# Altium PCB MPPT charger.PcbDoc
Units mm, origin at the board's own origin, x right, y up, seen from the top; angles counter-clockwise.
Board outline 24.13 x 33.02 mm, 2 copper layers (Top Layer, Bottom Layer); 24 components, 15 nets, 69 pads, 82 vias.
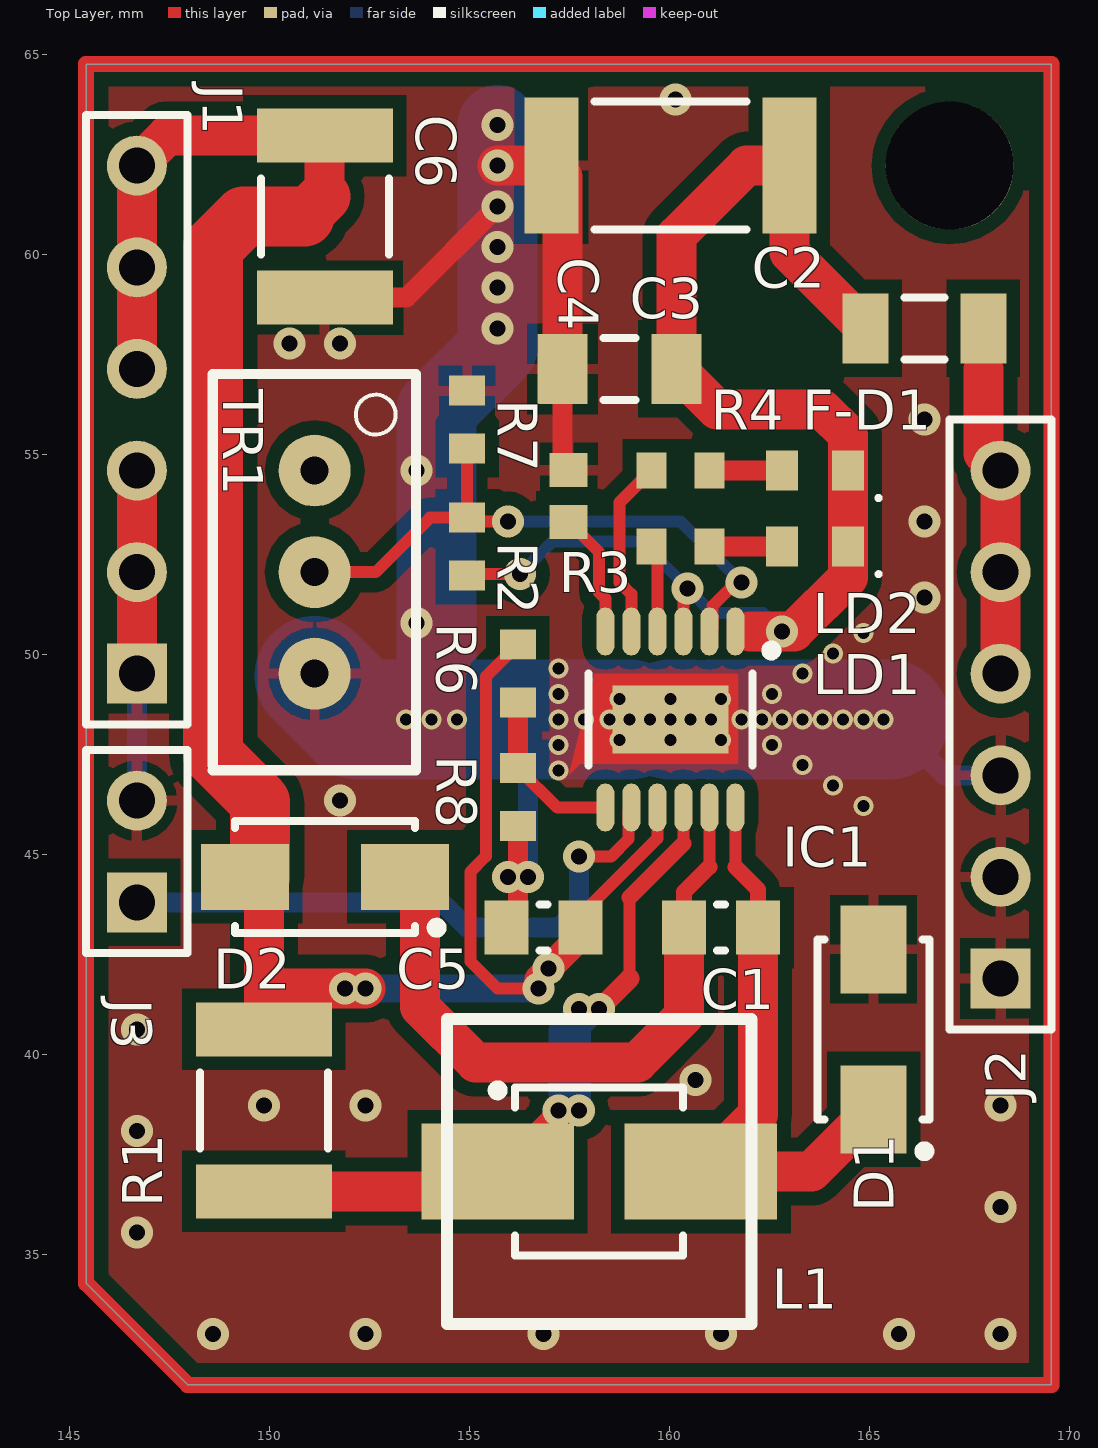
[diagram p0: Top Layer view]
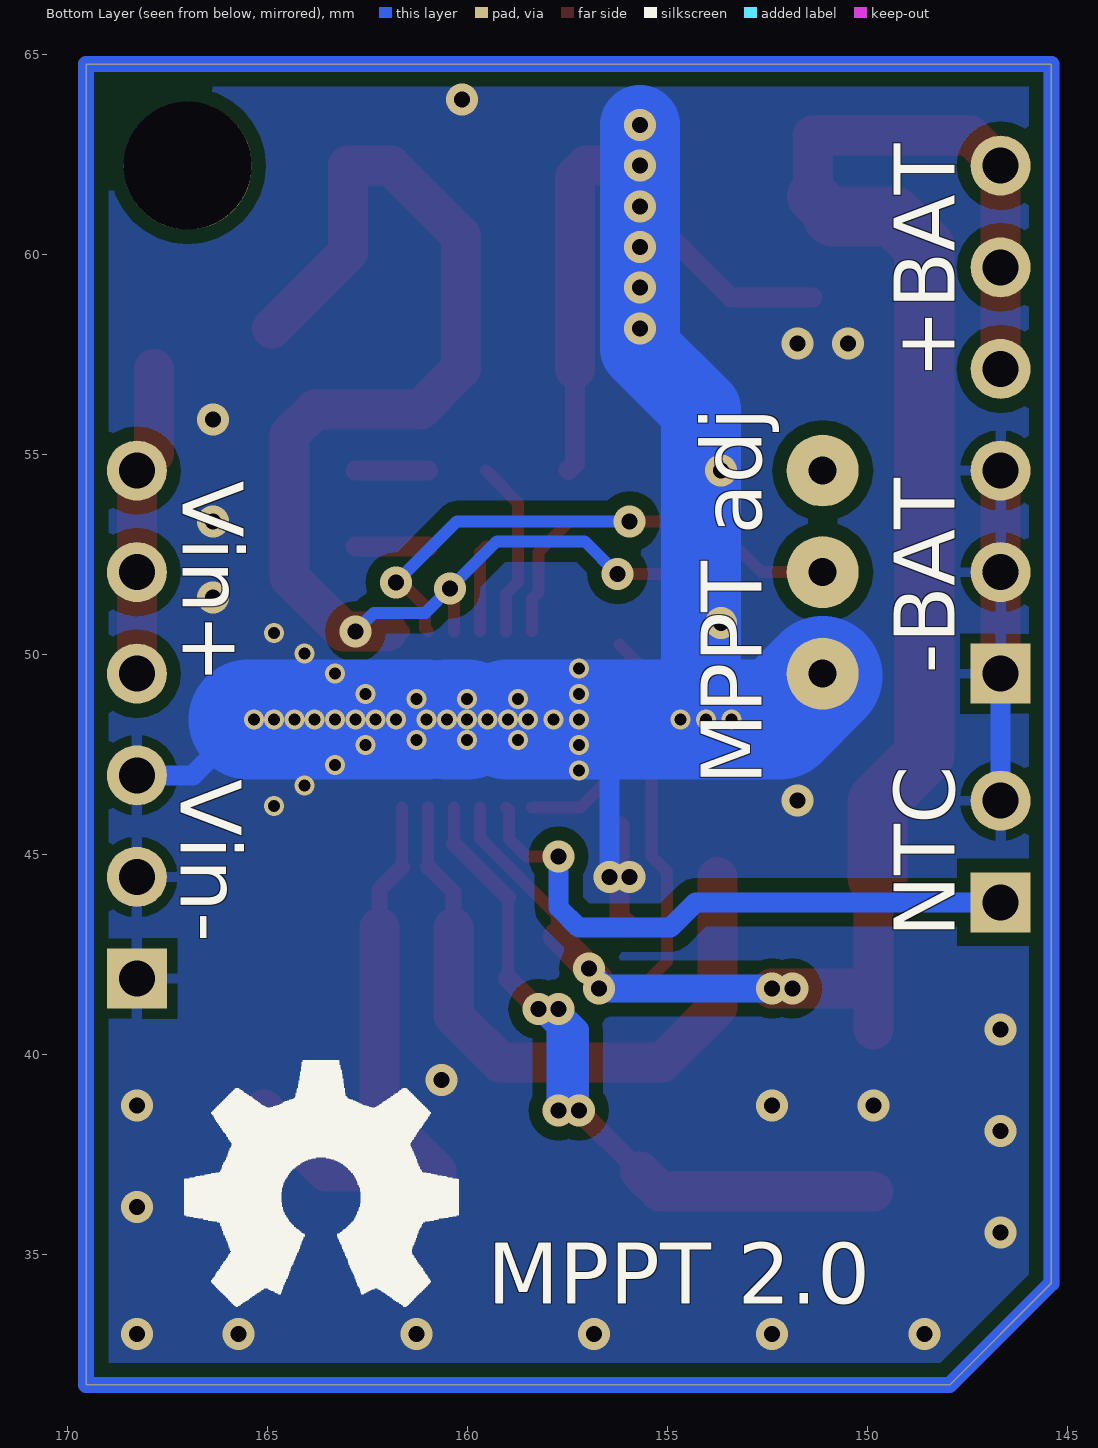
[diagram p1: Bottom Layer view, seen from below]
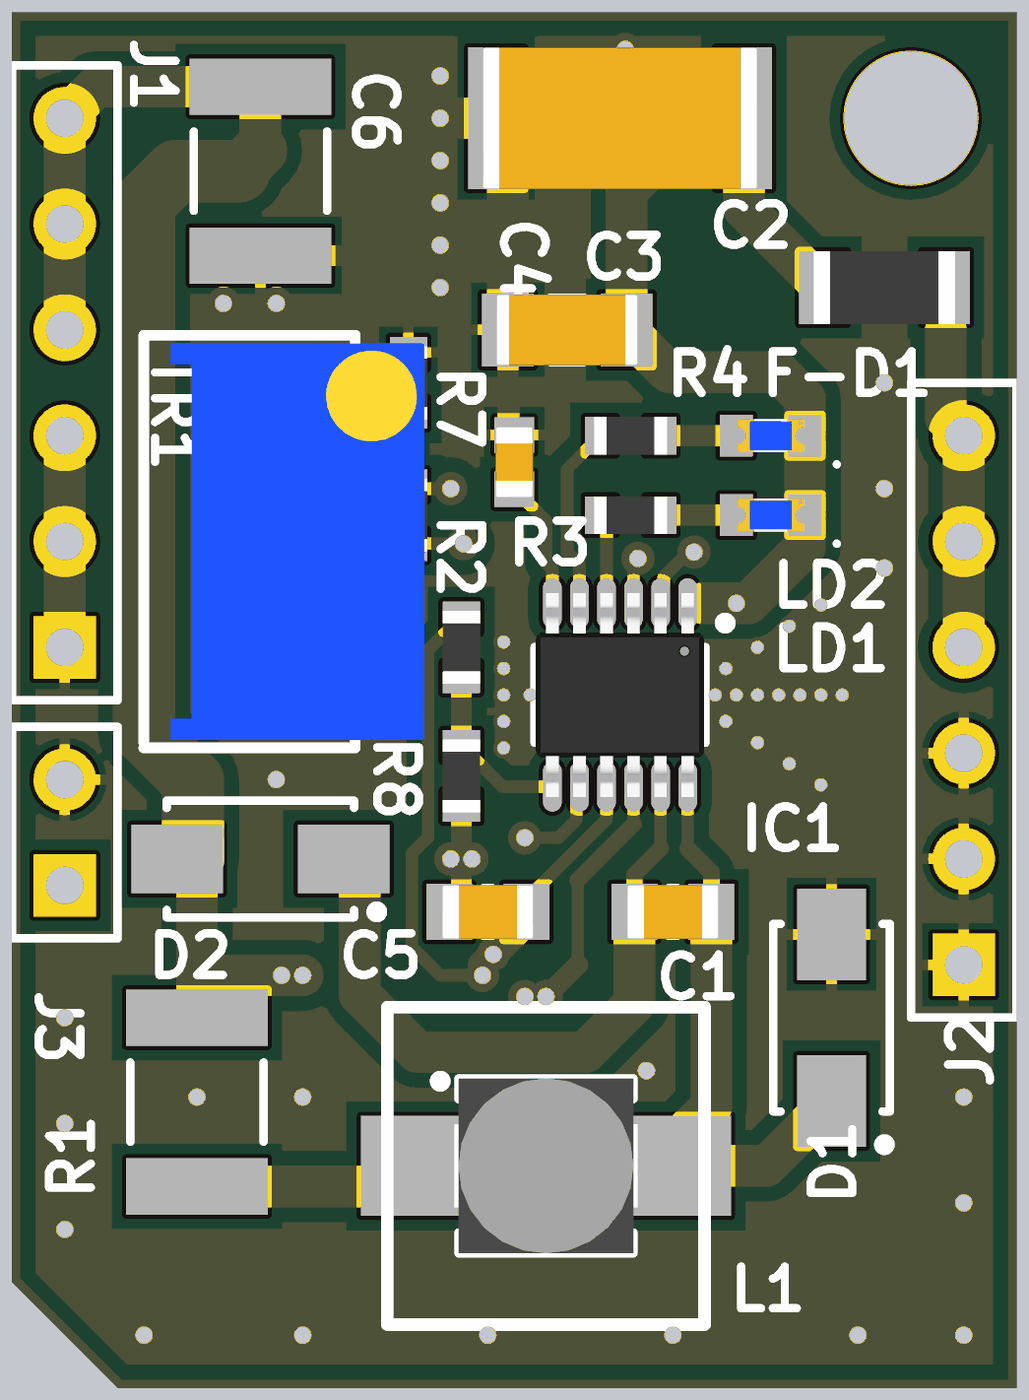
[diagram p2: 3D render of the assembled board from above, using the file's embedded part models]

## Layer stack, top to bottom
Top Solder: solder mask 0.0102, Solder Resist, Dk 3.5
Top Layer: signal copper 0.0356
Dielectric 1: dielectric 0.32, FR-4, Dk 4.8
Bottom Layer: signal copper 0.0356
Bottom Solder: solder mask 0.0102, Solder Resist, Dk 3.5

## Board outline
145.415,34.29 147.955,31.75 169.545,31.75 169.545,64.77 145.415,64.77

## Design rules (kind name [scope] priority, off if disabled: settings)
Clearance Clearance_polygon [InNamedPolygon('GND')] p1: gap=0.35 ignorepadtopadclearanceinfootprint=FALSE
Clearance [All] p2: gap=0.2 ignorepadtopadclearanceinfootprint=FALSE
PlaneConnect PlaneConnect_pour [InNet('GND')] p1: pad.planeconnectstyle=Relief pad.reliefexpansion=0.508 pad.reliefentries=4 pad.reliefconductorwidth=0.254 pad.reliefairgap=0.254 via.planeconnectstyle=Direct via.reliefexpansion=0.508 via.reliefentries=4 via.reliefconductorwidth=0.254 via.reliefairgap=0
PlaneConnect [All] p2: planeconnectstyle=Relief reliefexpansion=0.508 reliefentries=4 reliefconductorwidth=0.254 reliefairgap=0.254
PolygonConnect [InNet('GND')] p1: thpad.connectstyle=Relief thpad.reliefconductorwidth=0.254 thpad.reliefentries=4 thpad.polygonreliefangle="90 Angle" thpad.airgapwidth=0.254 smdpad.connectstyle=Relief smdpad.reliefconductorwidth=0.254 smdpad.reliefentries=4 smdpad.polygonreliefangle="90 Angle" smdpad.airgapwidth=0.254 via.connectstyle=Direct via.reliefconductorwidth=0.254 via.reliefentries=4 via.polygonreliefangle="90 Angle" via.airgapwidth=0.254
RoutingVias [All] p1: holewidth=0.4 width=0.8 viastyle="Through Hole" minholewidth=0.3 minwidth=0.7 maxholewidth=1 maxwidth=2
SolderMaskExpansion [All] p1: expansion=0.102
Width [All] p1: maxlimit=5 minlimit=0.2 preferedwidth=0.5 minimp=50.000000 maximp=50.000000 favimp=50.000000
29 further rules are at their usual default settings.

## Components (designator, comment, footprint, x,y, rotation, side; value= is the part's Value field where it differs from the comment)
C1 "Capacitor NP" "0805 CAP" 161.29,43.18 r0 top
C2 "Capacitor NP" "2512 CAP" 160.02,62.23 r0 top
C3 "Capacitor NP" "1206 CAP" 158.75,57.15 r0 top
C4 "Capacitor NP" "0603 cap" 157.48,53.975 r270 top
C5 "Capacitor NP" "0805 CAP" 156.845,43.18 r0 top
C6 "Capacitor NP" "1812 CAP" 151.384,60.96 r90 top
D1 "SS14" SMB 165.1,40.64 r270 top
D2 "SS14" SMB 151.384,44.45 r0 top
F-D1 "Resistor generic" "1206 RES" 166.37,58.166 r180 top
IC1 "LTC3652" "MSOP12 - EP" 160.02,48.387 r270 top
J1 "1_Chg" HDR1X6 146.685,49.53 r90 top locked
J2 "2_Chg" HDR1X6 168.275,41.91 r90 top locked
J3 "NTC" HDR1X2 146.685,43.815 r90 top
L1 "Inductor" FDSD0420-H 158.242,37.084 r0 top
LD1 "LED diode" LED_0603 163.639,52.705 r180 top
LD2 "LED diode" LED_0603 163.639,54.61 r180 top
R1 "Resistor generic" "1812 RES" 149.86,38.615 r270 top
R2 "Resistor generic" "0603 RES" 154.94,52.705 r270 top
R3 "Resistor generic" "0603 RES" 160.274,52.705 r180 top
R4 "Resistor generic" "0603 RES" 160.274,54.61 r180 top
R6 "Resistor generic" "0603 RES" 156.21,49.53 r90 top
R7 "Resistor generic" "0603 RES" 154.94,55.88 r270 top
R8 "Resistor generic" "0603 RES" 156.21,46.445 r90 top
TR1 "Resistor_trim" "Multiturn 1" 151.13,52.07 r270 top

## Footprints (in the part's own frame and the unit in brackets; to place one, negate y for a bottom-side part, rotate by r counter-clockwise, add the part's x,y. Pads: shape width x height; smd on the part's side, far side on the other; paste and mask are expansions set on the pad)
"0603 cap" [mm]
  rect 0.85x0.95 smd: 1(-0.65,0) 2(0.65,0)
  body extent -0.85,-0.45 0.85,0.45, height 0.8
"0603 RES" [mm] "RES0603 medium"
  rect 0.75x0.9 smd: 1(-0.725,0) 2(0.725,0)
  body extent -0.87,-0.45 0.87,0.45, height 0.4
"0805 CAP" [mm] "0805 cap"
  rect 1.1x1.35 smd: 1(-0.925,0) 2(0.925,0)
  silkscreen extent -0.1,-0.58 0.1,0.58, body extent -1.1,-0.65 1.1,0.65, height 0.8
"1206 CAP" [mm] "1206 cap med"
  rect 1.25x1.75 smd: 1(-1.425,0) 2(1.425,0)
  silkscreen extent -0.4,-0.77 0.4,0.77, body extent -1.7,-0.85 1.7,0.85, height 0.7
"1206 RES" [mm] "RES1206 med"
  rect 1.15x1.75 smd: 1(-1.475,0) 2(1.475,0)
  silkscreen extent -0.5,-0.77 0.5,0.77, body extent -1.7,-0.87 1.7,0.87, height 0.55
"1812 CAP" [mm] "1812 CAP med"
  rect 1.35x3.4 smd: 1(-2.025,0) 2(2.025,0)
  silkscreen extent -0.95,-1.6 0.95,1.6, body extent -2.35,-1.7 2.35,1.7, height 2
"1812 RES" [mm] "1812 RES med"
  rect 1.35x3.4 smd: 1(-2.025,0) 2(2.025,0)
  silkscreen extent -0.95,-1.6 0.95,1.6, body extent -2.35,-1.7 2.35,1.7, height 0.6
"2512 CAP" [mm] "2512 CAP med"
  rect 1.35x3.4 smd: 1(-2.975,0) 2(2.975,0)
  silkscreen extent -1.9,-1.6 1.9,1.6, body extent -3.3,-1.7 3.3,1.7, height 3
FDSD0420-H [mm] "Murata FDSD0420-H SMD Inductor"
  rect 3.81x2.4 smd: 1(-2.54,0) 2(2.54,0)
  silkscreen extent -2.66,-2.1 2.1,2.16, body extent -2.2,-2.1 2.2,2.1, height 2.1
HDR1X2 [mm] "Connector; Header; 2 Position"
  rect 1.5x1.5 hole 0.9: 1(0,0)
  round 1.5 hole 0.9: 2(2.54,0)
  silkscreen extent -1.27,-1.27 3.81,1.27
HDR1X6 [mm] "Connector; Header; 6 Position"
  rect 1.5x1.5 hole 0.9: 1(0,0)
  round 1.5 hole 0.9: 2(2.54,0) 3(5.08,0) 4(7.62,0) 5(10.16,0) 6(12.7,0)
  silkscreen extent -1.27,-1.27 13.97,1.27
LED_0603 [mm] "LED diode 0603"
  rect 0.8x1 smd: 1(-0.825,0) 2(0.825,0)
  silkscreen extent -1.64,0.64 -1.54,0.74, body extent -0.8,-0.4 0.8,0.4, height 0.6
"MSOP12 - EP" [mm] "MSOP, 12-Leads, Body 4,00x3,00mm, Pitch 0,65mm, Thermal Pad 2,90x1,70mm, IPC Medium Density"
  oval 1.2x0.45 smd: 1(-2.2,1.625) 2(-2.2,0.975) 3(-2.2,0.325) 4(-2.2,-0.325) 5(-2.2,-0.975) 6(-2.2,-1.625) 7(2.2,-1.625) 8(2.2,-0.975) 9(2.2,-0.325) 10(2.2,0.325) 11(2.2,0.975) 12(2.2,1.625)
  rect 1.7x2.9 smd: 13(0,0)
  silkscreen extent -1.85,-2.05 1.15,2.65, body extent -2.45,-2.02 2.45,2.02, height 1.1
"Multiturn 1" [mm] "Multiturn Trimmer Narrow"
  round 1.8 hole 0.7: 1(-2.54,0) 2(2.54,0) 3(0,0)
  silkscreen extent -4.95,-2.55 4.95,2.53, body extent -4.76,-1.9 4.76,4.19, height 11.56
SMB [mm] "SMB diode SS14"
  rect 2.2x1.65 smd: 1(-2,0) 2(2,0)
  silkscreen extent -2.25,-1.4 3.17,1.4, body extent -2.25,-1.4 2.25,1.39, height 2.3

## Part data
D1 D2: library part "Diode 1N4148", "High Conductance Fast Diode"
F-D1 R1 R2 R3 R4 R6 R7 R8: library part Resistor, "Resistor SMD"
  R1: Valve="Sense 10m"
  R2: Valve=47k
  R3 R4: Valve=1k5
  R6: Valve="FB1 47kII390k"
  R7: Valve=39k/NP
  R8: Valve="FB2 220k"
J1 J2: library part "Header 6", "Header, 6-Pin", LatestRevisionDate=17-Jul-2002, LatestRevisionNote="Re-released for DXP Platform.", Publisher="Altium Limited"
J3: library part "Pin Header 2", Beta=3380, Valve=10k
L1: "Single coil", Current=>4A, Supplier Part Number 1=2530091, Supplier 1=Farnell, Valve=5,6uH
LD1 LD2: "LED"
TR1: "Trimmer", Valve=100k/NP
C1: Valve=1uF
C2: Valve="220uF 6V"
C3: Valve="10uF 16V"
C4: Valve=0R/Timer
C5 C6: Valve="10uF 6V"

## Free pads (board coordinates)
  round 3.2 hole 3.2: 9(167.005,62.23)

## Via types
v1: diameter 0.8, hole 0.4, Top Layer to Bottom Layer, tented both sides, 45 vias
v2: diameter 0.5, hole 0.3, Top Layer to Bottom Layer, tented both sides, 37 vias

## Nets (pads, with @x,y where several pads share a name; then routed paths per layer and width w, separated by ;. In a path a pad name is that pad's centre, name@x,y a point inside that pad or via, vN(x,y) a via of type N, cw(c..) or ccw(c..) an arc to the next point about the centre after c; other vN are vias at no path point)
GND: C2.1 C3.1 C4.1 C5.1 C6.1 D1.1 IC1.13 J1.1 J1.2 J1.3 J2.1 J2.2 J2.3 J3.2 R7.1 R8.1 TR1.2 | length 64.7
  Top Layer w0.5: C6.1 153.423,58.935 v1(155.702,61.214) ; C5.1 156.21,43.47 R8.1 ; C3.1 157.325,54.78 C4.1
  Top Layer w1: J1.1 J1.2 J1.3 ; v1(155.702,62.23) C2.1 157.325,61.95 C3.1
  Bottom Layer w0.5: J3.2 J1.1 ; TR1.2 152.273,48.387 ; v1(156.464,44.45) 156.464,48.006 156.845,48.387 ; v2(159.004,48.387) v2(159.512,48.387) v2(160.02,48.387) ; v2(160.528,48.387) v2(161.036,48.387) ; v2@165.481,48.387 166.878,46.99 J2.3
  Bottom Layer w2: v2@154.178,48.387 154.178,56.134 155.702,57.658 v1(155.702,61.214) v1(155.702,62.23) v1(155.702,63.246)
  Bottom Layer w3: TR1.2@151.13,49.47 152.213,48.387 152.273,48.387 154.178,48.387 156.845,48.387 v2(159.004,48.387) ; v2(160.02,48.387) v2(160.528,48.387) ; v2(161.036,48.387) v2@165.481,48.387
  other v1: 148.59,33.02 152.4,33.02 156.845,33.02 161.29,33.02 165.735,33.02 168.275,33.02 146.685,35.56 168.275,36.195 146.685,38.1 149.86,38.735 152.4,38.735 168.275,38.735 160.655,39.37 146.685,40.64 155.956,44.45 151.765,46.355 153.67,50.8 166.37,51.435 166.37,53.34 153.67,54.61 166.37,55.88 150.495,57.785 151.765,57.785 155.702,58.166 155.702,59.182 155.702,60.198 160.147,63.881
  other v2: 164.846,46.228 164.084,46.736 157.226,47.117 163.322,47.244 157.226,47.752 162.56,47.752 158.75,47.879 160.02,47.879 161.29,47.879 153.416,48.387 154.051,48.387 154.686,48.387 157.226,48.387 157.861,48.387 158.496,48.387 161.798,48.387 162.306,48.387 162.814,48.387 163.322,48.387 163.83,48.387 164.338,48.387 164.846,48.387 165.354,48.387 158.75,48.895 160.02,48.895 161.29,48.895 157.226,49.022 162.56,49.022 163.322,49.53 157.226,49.657 164.084,50.038 164.846,50.546
NetC1_1: C1.1 D2.2 IC1.11 | length 16.4
  Top Layer w0.3: 160.995,44.704 IC1.11
  Top Layer w0.4: C1.1 160.365,44.074 160.995,44.704
  Top Layer w1: D2.2@153.765,44.45 153.765,41.197 155.149,39.813 159.193,39.813 160.365,40.985 C1.1
NetC1_2: C1.2 D1.2 IC1.12 L1.2 | length 14.9
  Top Layer w0.3: 161.645,44.704 IC1.12
  Top Layer w0.4: 161.645,44.704 162.215,44.134 C1.2
  Top Layer w1: C1.2 162.215,38.517 L1.2 163.544,37.084 D1.2
NetC2_2: C2.2 C3.2 F-D1.2 IC1.1 IC1.3 LD1.1 LD2.1 R2.2 | length 33.9
  Top Layer w0.3: R2.2 154.979,52.019 v1(156.261,52.019) ; IC1.3 160.345,51.557 v1(160.452,51.664)
  Top Layer w0.4: IC1.1 162.011,50.587
  Top Layer w1: 162.011,50.587 v1(162.814,50.587) 163.109,50.587 164.464,51.942 LD1.1 LD2.1 164.464,55.5 163.83,56.134 161.191,56.134 C3.2 160.175,60.48 161.925,62.23 C2.2 162.995,60.066 F-D1.2
  Bottom Layer w0.3: v1(156.261,52.019) 157.082,52.84 159.275,52.84 v1(160.452,51.664) 161.061,51.054 162.347,51.054 v1(162.814,50.587)
NetC4_2: C4.2 IC1.6 | length 3.1
  Top Layer w0.3: C4.2 158.242,52.563 158.242,51.562 158.395,51.409 IC1.6
NetC5_2: C5.2 C6.2 D2.1 IC1.9 J1.4 J1.5 J1.6 R1.1 R6.2 | length 59.8
  Top Layer w0.3: R6.2 155.41,49.455 155.41,44.965 155.02,44.575 155.02,42.338 155.702,41.656 v1(156.718,41.656) ; v1(156.975,42.161) 156.975,42.167 157.77,42.962 C5.2 157.77,43.486 159.695,45.411 IC1.9
  Top Layer w0.7: v1(156.718,41.656) 156.718,41.904 v1(156.975,42.161) 157.77,42.956 C5.2@157.77,42.962
  Top Layer w1: J1.4 J1.5 J1.6 147.44,62.985 C6.2@151.377,62.985 ; D2.1@149.765,44.45 149.86,44.355 149.86,41.656 ; R1.1 149.86,41.656 ; 151.377,61.461 C6.2@151.377,62.985 ; C6.2 C6.2@151.377,62.985 ; v1(152.4,41.656) v1(151.892,41.656) 149.86,41.656
  Top Layer w1.3: 150.876,60.96 151.377,61.461
  Top Layer w1.5: D2.1@149.765,44.45 149.765,46.323 148.59,47.498 148.59,60.198 149.352,60.96 150.876,60.96
  Bottom Layer w0.5: v1(156.718,41.656) 156.718,41.904 v1(156.975,42.161)
  Bottom Layer w0.7: v1(152.4,41.656) v1(156.718,41.656)
NetF-D1_1: F-D1.1 J2.4 J2.5 J2.6 | length 7.8
  Top Layer w1: 167.845,57.15 167.845,55.04 J2.6 J2.5 J2.4
NetIC1_2: IC1.2 R2.1 R7.2 TR1.3 | length 15.8
  Top Layer w0.3: TR1.3 152.654,52.07 154.014,53.43 R2.1 ; R7.2 R2.1 ; v1(155.956,53.34) 155.03,53.34 R2.1 ; IC1.2 161.07,50.662 161.07,51.221 v1@161.665,51.816 ; v1@161.544,51.816 v1@161.665,51.816 ; v1@161.798,51.602 v1(161.798,51.816) v1@161.665,51.816
  Bottom Layer w0.3: v1(155.956,53.34) 160.274,53.34 v1(161.798,51.816) 161.994,51.816 v1@162.023,51.787
NetIC1_4: IC1.4 R3.2 | length 2.2
  Top Layer w0.3: R3.2 159.695,52.559 IC1.4
NetIC1_5: IC1.5 R4.2 | length 4.5
  Top Layer w0.3: IC1.5 159.045,51.521 158.75,51.816 158.75,53.811 R4.2
NetIC1_7: IC1.7 R6.1 R8.2 | length 4.2
  Top Layer w0.3: R8.2 157.193,46.187 IC1.7
  Top Layer w0.5: R8.2 R6.1
NetIC1_8: IC1.8 J3.1 | length 15
  Top Layer w0.3: v1(157.734,44.958) 158.535,44.958 158.97,45.393 158.97,46.112 IC1.8
  Bottom Layer w0.5: J3.1 154.305,43.815 154.94,43.18 157.226,43.18 157.734,43.688 v1(157.734,44.958)
NetIC1_10: IC1.10 L1.1 R1.2 | length 21.1
  Top Layer w0.3: 159.004,41.91 159.004,43.942 ; 160.345,45.283 IC1.10
  Top Layer w0.4: 159.004,43.942 160.345,45.283
  Top Layer w0.5: L1.1 v1(157.226,38.608) v1(157.734,38.608) ; v1(158.242,41.148) 159.004,41.91
  Top Layer w1: R1.2 155.208,36.59 L1.1
  Bottom Layer w0.5: v1(157.226,38.608) 157.226,40.64 v1(157.734,41.148) ; v1(157.734,41.148) 157.734,40.64 v1(158.242,41.148) v1(157.734,41.148)
  Bottom Layer w0.6: v1(157.734,38.608) 157.734,40.64
NetLD1_2: LD1.2 R3.1 | length 1.8
  Top Layer w0.5: R3.1 LD1.2
NetLD2_2: LD2.2 R4.1 | length 1.8
  Top Layer w0.5: R4.1 LD2.2
pads on no net: TR1.1

## Polygon pours and split planes (outlines as drawn)
GND on Top Layer "GND" (solid, remove dead copper, pour order 3): 145.415,34.29 147.955,31.75 169.545,31.75 169.545,64.77 145.415,64.77
GND on Bottom Layer "GND" (solid, pour order 4): 145.415,34.29 147.955,31.75 169.545,31.75 169.545,64.77 145.415,64.77

## Other copper
Top Layer:
  region net GND: 158.115,49.53 161.685,49.53 161.724,49.491 161.724,47.283 157.773,47.283 157.48,46.99
Multi-Layer:
  the board outline again, w0.4

## Silkscreen, mask and mechanical layers (free items; w line width, h text height)
Top Overlay:
  lines w0.3: 154.432,33.274 154.432,40.894 162.052,40.894 162.052,33.274 154.432,33.274
Bottom Overlay:
  region: 1925 vertices and 0 holes, not listed, extent 160.232,33.705 167.096,39.87
  text "+BAT" at 147.828,56.896 h1.52 r270
  text "Vin+" at 167.132,54.356 h1.52 r90
  text "-BAT" at 147.828,49.53 h1.52 r270
  text "Vin-" at 167.178,46.896 h1.52 r90
  text "MPPT adj" at 152.654,46.736 h1.52 r270
  text "NTC" at 147.828,42.926 h1.52 r270
  text "MPPT 2.0" at 159.512,33.782 h1.52